# Altium PCB Display.PcbDoc
Units mm, origin at the board's own origin, x right, y up, seen from the top; angles counter-clockwise.
Board outline 43 x 35 mm, 2 copper layers (Top Layer, Bottom Layer); 41 components, 45 nets, 149 pads, 84 vias.
Unrouted connection lines stored in the file: 1.
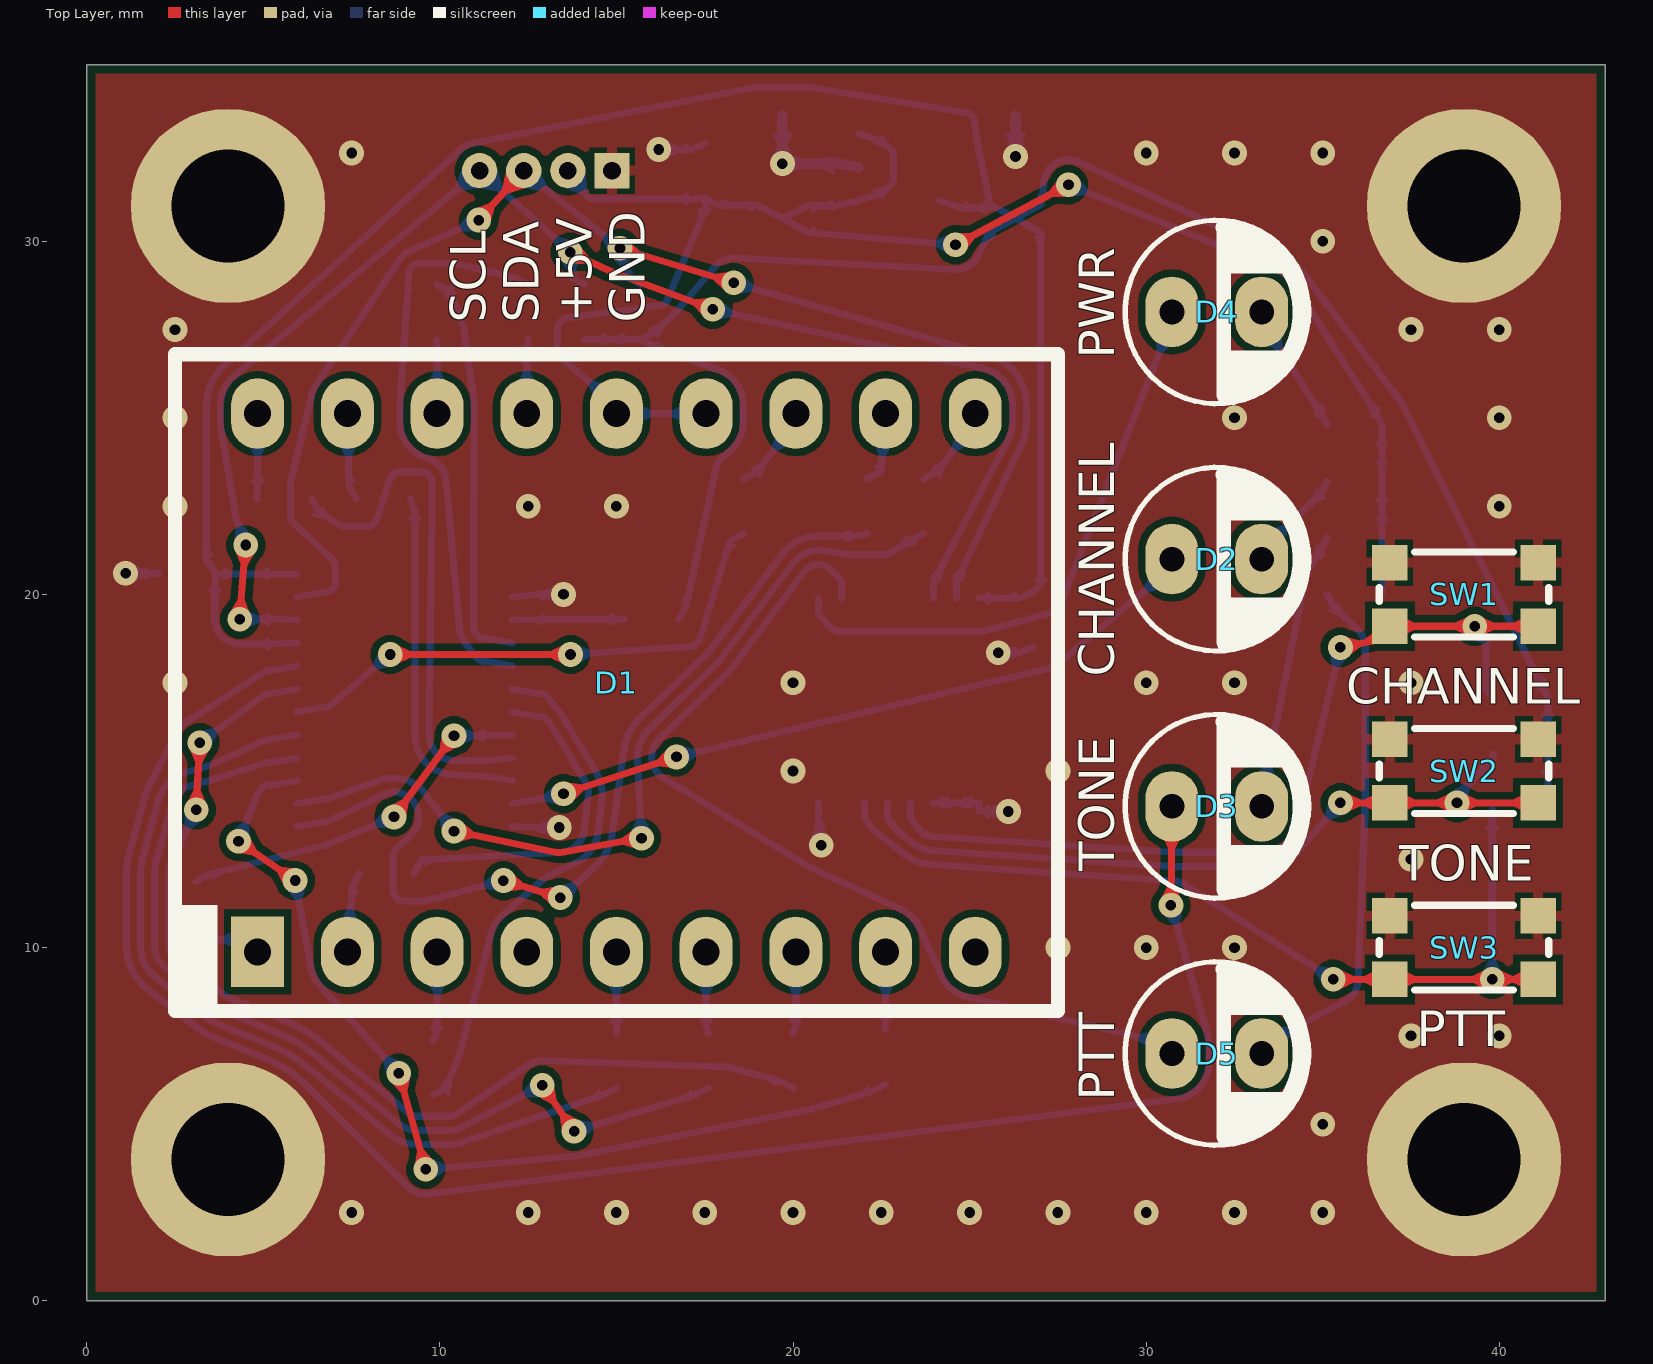
[diagram p0: Top Layer view]
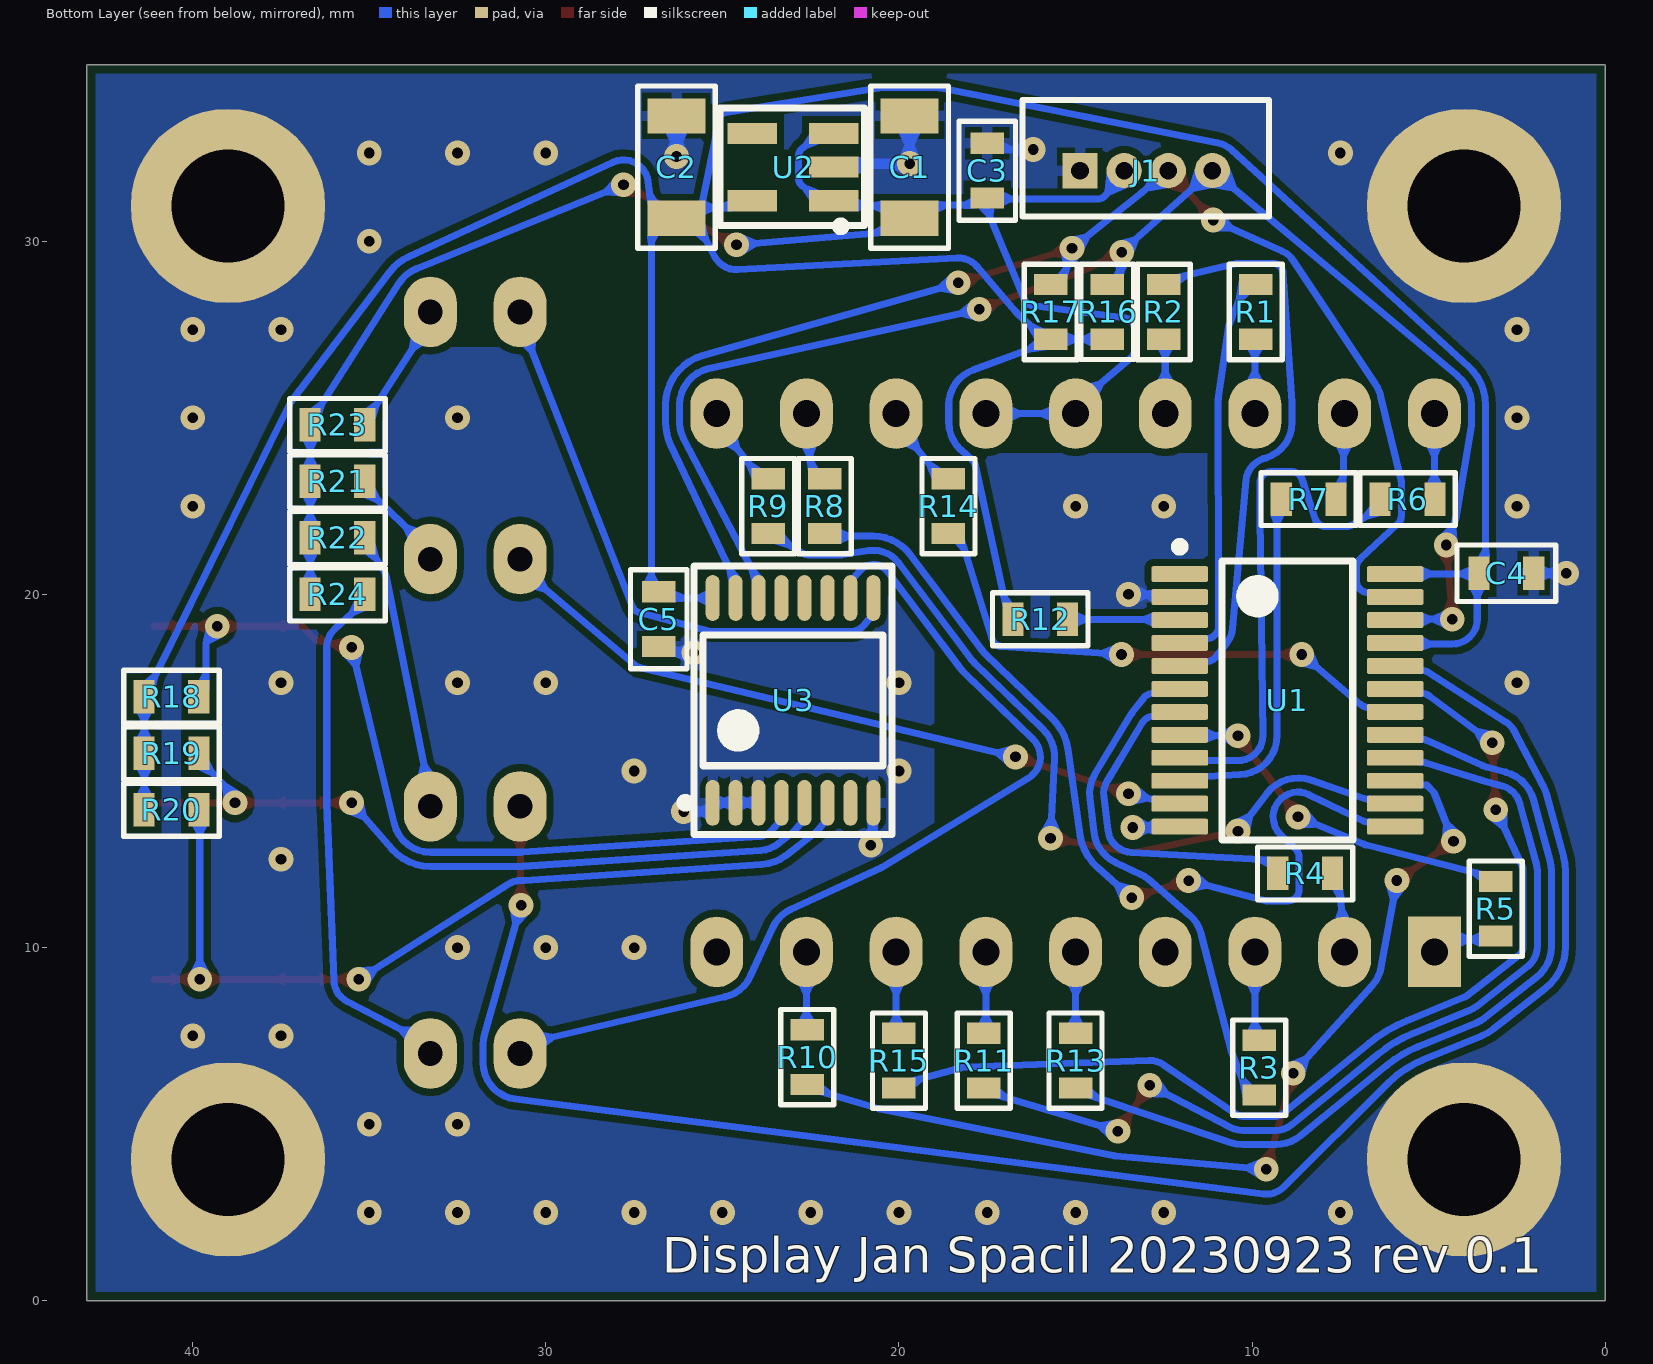
[diagram p1: Bottom Layer view, seen from below]
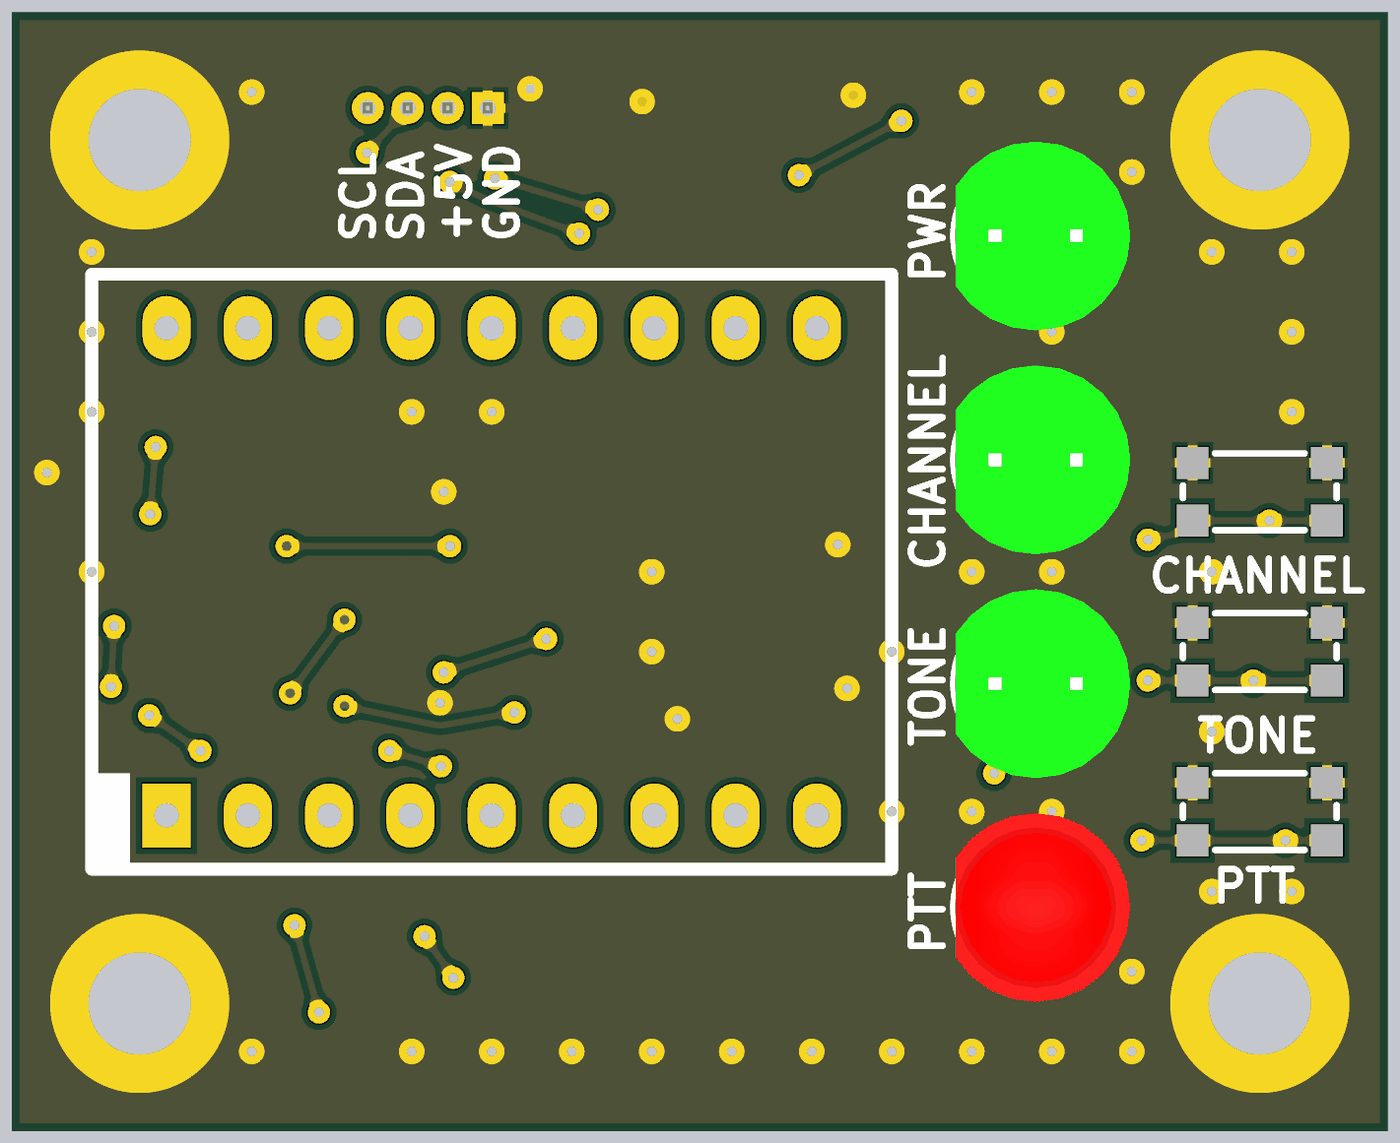
[diagram p2: 3D render of the assembled board from above, using the file's embedded part models]
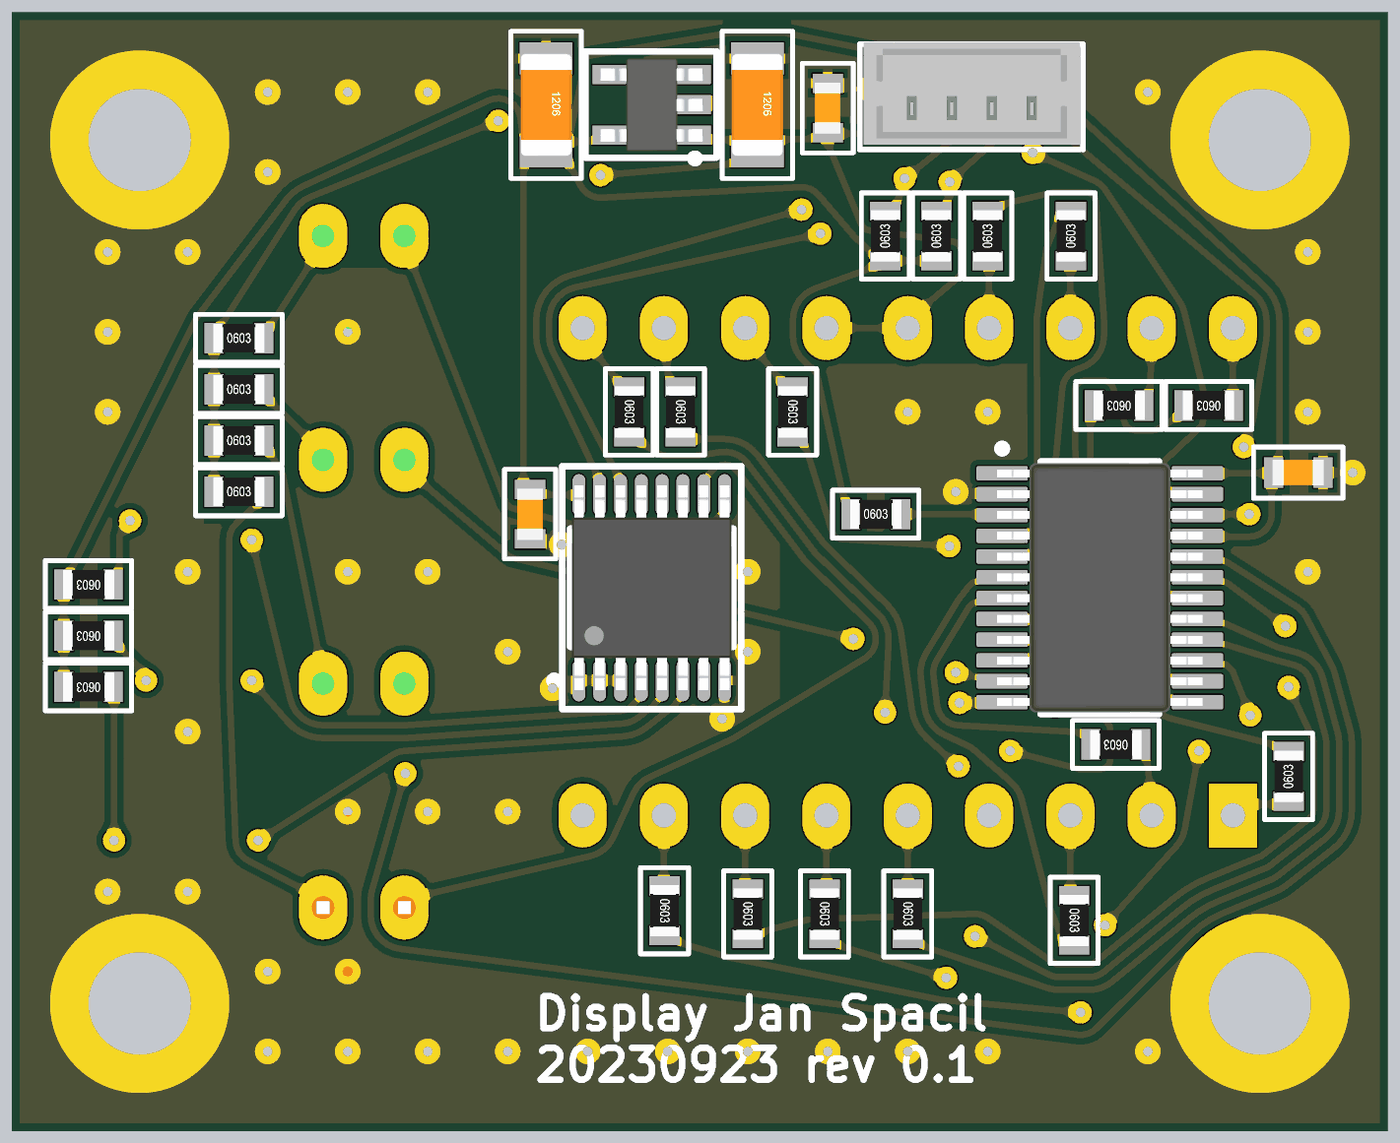
[diagram p3: 3D render of the assembled board from below, using the file's embedded part models]

## Layer stack, top to bottom
Top Solder: solder mask 0.0102, Solder Resist, Dk 3.5
Top Layer: signal copper 0.0356
Dielectric 1: dielectric 0.32, FR-4, Dk 4.8
Bottom Layer: signal copper 0.0356
Bottom Solder: solder mask 0.0102, Solder Resist, Dk 3.5

## Board outline
0,0 0,35 43,35 43,0

## Design rules (kind name [scope] priority, off if disabled: settings)
Clearance [All] p1: gap=0.2 ignorepadtopadclearanceinfootprint=FALSE except(0: Arc-Hole Track-Hole SMDPad-Hole THPad-Hole Via-Hole Fill-Hole Poly-Hole Region-Hole Text-Hole; 0.254: Arc-Via Track-Via Via-Via; 0.5: THPad-Via)
ComponentClearance [All] p1: gap=0.15 collisioncheckmode=3 verticalgap=0.254 showdistances=FALSE
HoleSize [All] p1: absolutevalues=TRUE maxlimit=6.3 minlimit=0.2 maxpercent=80.000 minpercent=20.000
HoleToHoleClearance [All] p1: gap=0.5 allowstackedmicrovias=TRUE
MinimumAnnularRing [All] p1: minimumring=0.13
MinimumSolderMaskSliver [All] p1: minsoldermaskwidth=0.2
PlaneConnect [All] p1: planeconnectstyle=Direct reliefexpansion=0.508 reliefentries=4 reliefconductorwidth=0.254 reliefairgap=0.254
PolygonConnect "Free pads to gnd" [(ObjectKind = 'Pad') And (Component = 'Free') vs InNet('GND')] p1: connectstyle=Direct reliefconductorwidth=0.254 reliefentries=4 polygonreliefangle="90 Angle" airgapwidth=0.254
PolygonConnect "Footprint connection" [All vs HasFootprint('DCC6C') or HasFootprint('32K243-40ML5 ro4003c') or HasFootprint('CONUFL001-SMD-T')] p2: connectstyle=Direct reliefconductorwidth=0.254 reliefentries=4 polygonreliefangle="90 Angle" airgapwidth=0.254
PolygonConnect "Via connection" [All vs IsVia or IsShieldingVia or IsStitchingVia] p3: connectstyle=Direct reliefconductorwidth=0.254 reliefentries=4 polygonreliefangle="90 Angle" airgapwidth=0.254
PolygonConnect [All] p4: connectstyle=Relief reliefconductorwidth=0.3 reliefentries=4 polygonreliefangle="90 Angle" airgapwidth=0.15
RoutingCorners [All] p1: cornerstyle=45-Degree minsetback=1 maxsetback=2.54
RoutingVias [All] p1: holewidth=0.3 width=0.6 viastyle="Through Hole" minholewidth=0.3 minwidth=0.6 maxholewidth=6 maxwidth=7
SilkToSilkClearance [All] p1: silktosilkclearance=0
SilkToSolderMaskClearance [IsPad] p1: minsilkscreentomaskgap=0.15 clearancetoexposedcopper=TRUE
SolderMaskExpansion SolderMaskExpansion_1 [IsVia] p1: expansion=-0.1 istentingtop=FALSE
SolderMaskExpansion [All] p2: expansion=0.05 istentingtop=FALSE
UnRoutedNet [All] p1: checkbadconnections=TRUE
Width [All] p1: maxlimit=3 minlimit=0.15 preferedwidth=0.2
21 further rules are at their usual default settings.

## Components (designator, comment, footprint, x,y, rotation, side; value= is the part's Value field where it differs from the comment)
C1 "10u, 50V, X5R" SMD1206 19.7,32.1 r270 bottom
C2 "10u, 50V, X5R" SMD1206 26.3,32.1 r270 bottom
C3 "1u, 25V, X7R" SMD0603 17.5,32 r90 bottom
C4 "1u, 25V, X7R" SMD0603 2.8,20.6 r180 bottom
C5 "1u, 25V, X7R" SMD0603 26.8,19.3 r270 bottom
D1 "HDSP-521E" HDSP-521E 15,17.5 r0 top locked
D2 "Green" "Cree C566D green" 32,21 r180 top locked
D3 "Green" "Cree C566D green" 32,14 r180 top locked
D4 "Green" "Cree C566D green" 32,28 r180 top locked
D5 "Red" "Cree C566D RED" 32,7 r180 top locked
J1 "53047-0410" 530470410 13,32 r180 bottom
R1 "1k, 1%" "SMD0603 - R" 9.9,28 r90 bottom
R2 "1k, 1%" "SMD0603 - R" 12.5,28 r90 bottom
R3 "1k, 1%" "SMD0603 - R" 9.8,6.6 r270 bottom
R4 "1k, 1%" "SMD0603 - R" 8.5,12.1 r0 bottom
R5 "1k, 1%" "SMD0603 - R" 3.1,11.1 r90 bottom
R6 "1k, 1%" "SMD0603 - R" 5.6,22.7 r0 bottom
R7 "1k, 1%" "SMD0603 - R" 8.4,22.7 r0 bottom
R8 "1k, 1%" "SMD0603 - R" 22.1,22.5 r270 bottom
R9 "1k, 1%" "SMD0603 - R" 23.7,22.5 r270 bottom
R10 "1k, 1%" "SMD0603 - R" 22.6,6.9 r270 bottom
R11 "1k, 1%" "SMD0603 - R" 17.6,6.8 r270 bottom
R12 "100k, 1%" "SMD0603 - R" 16,19.3 r180 bottom
R13 "1k, 1%" "SMD0603 - R" 15,6.8 r270 bottom
R14 "1k, 1%" "SMD0603 - R" 18.6,22.5 r270 bottom
R15 "1k, 1%" "SMD0603 - R" 20,6.8 r270 bottom
R16 "100k, 1%" "SMD0603 - R" 14.1,28 r90 bottom
R17 "100k, 1%" "SMD0603 - R" 15.7,28 r90 bottom
R18 "100k, 1%" "SMD0603 - R" 40.6,17.1 r0 bottom
R19 "100k, 1%" "SMD0603 - R" 40.6,15.5 r0 bottom
R20 "100k, 1%" "SMD0603 - R" 40.6,13.9 r0 bottom
R21 "10k, 1%" "SMD0603 - R" 35.9,23.2 r180 bottom
R22 "10k, 1%" "SMD0603 - R" 35.9,21.6 r180 bottom
R23 "10k, 1%" "SMD0603 - R" 35.9,24.8 r180 bottom
R24 "10k, 1%" "SMD0603 - R" 35.9,20 r180 bottom
SW1 "KMR241G" KMR2 39,20 r0 top
SW2 "KMR241G" KMR2 39,15 r0 top
SW3 "KMR241G" KMR2 39,10 r0 top
U1 "TCA9539PWR" PW0024A_M 9,17 r180 bottom
U2 "LDK320M33R" SOT23-5 23,32.1 r0 bottom
U3 "TCA9534APWR" TSSOP16N 23,17 r90 bottom

## Footprints (in the part's own frame and the unit in brackets; to place one, negate y for a bottom-side part, rotate by r counter-clockwise, add the part's x,y. Pads: shape width x height; smd on the part's side, far side on the other; paste and mask are expansions set on the pad)
530470410 [mm]
  rect 1x1 hole 0.5: 1(-1.875,0)
  round 1 hole 0.5: 2(-0.625,0) 3(0.625,0) 4(1.875,0)
  silkscreen extent -3.5,-1.3 3.47,2, body extent -3.37,-1.15 3.38,2.05, height 4.23
"Cree C566D green" [mm]
  oval 1.5x2 hole 0.7 mask+0.05: 1(-1.27,0) 2(1.27,0)
  silkscreen extent -2.6,-2.6 2.6,2.6, body extent -2.95,-2.95 2.5,2.95, height 9.04
"Cree C566D RED" [mm]
  oval 1.5x2 hole 0.7 mask+0.05: 1(-1.27,0) 2(1.27,0)
  silkscreen extent -2.6,-2.6 2.6,2.6, body extent -2.95,-2.95 2.5,2.95, height 9.04
HDSP-521E [mm]
  rect 1.5x2 hole 0.762 mask+0.05: 1(-10.16,-7.62)
  oval 1.5x2 hole 0.762 mask+0.05: 2(-7.62,-7.62) 3(-5.08,-7.62) 4(-2.54,-7.62) 5(0,-7.62) 6(2.54,-7.62) 7(5.08,-7.62) 8(7.62,-7.62) 9(10.16,-7.62) 10(10.16,7.62) 11(7.62,7.62) 12(5.08,7.62) 13(2.54,7.62) 14(0,7.62) 15(-2.54,7.62) 16(-5.08,7.62) 17(-7.62,7.62) 18(-10.16,7.62)
  silkscreen extent -12.5,-9.3 12.5,9.3
KMR2 [mm]
  rect 1x1 smd: 1(-2.1,-0.9) 1(2.1,-0.9) 2(-2.1,0.9) 2(2.1,0.9)
  silkscreen extent -2.4,-1.2 2.4,1.2
PW0024A_M [mm] "SOP, 24-Leads, Body 7.9x4.5mm, Pitch 0.65mm, IPC Low Density"
  rrect22% 1.6x0.45 smd: 1(-3.05,3.575) 2(-3.05,2.925) 3(-3.05,2.275) 4(-3.05,1.625) 5(-3.05,0.975) 6(-3.05,0.325) 7(-3.05,-0.325) 8(-3.05,-0.975) 9(-3.05,-1.625) 10(-3.05,-2.275) 11(-3.05,-2.925) 12(-3.05,-3.575) 13(3.05,-3.575) 14(3.05,-2.925) 15(3.05,-2.275) 16(3.05,-1.625) 17(3.05,-0.975) 18(3.05,-0.325) 19(3.05,0.325) 20(3.05,0.975) 21(3.05,1.625) 22(3.05,2.275) 23(3.05,2.925) 24(3.05,3.575)
  silkscreen extent -3.17,-3.95 1.85,4.47, body extent -3.21,-3.9 3.21,3.9, height 1
SMD0603 [mm] "2-Leads, Body 1,60x0,85mm(0603), IPC Medium Density"
  rect 0.6x0.95 smd: 1(-0.775,0) 2(0.775,0)
  silkscreen extent -1.4,-0.8 1.4,0.8, body extent -0.8,-0.4 0.8,0.4, height 0.7
"SMD0603 - R" [mm] "2-Leads, Body 1,60x0,85mm(0603), IPC Medium Density"
  rect 0.6x0.95 smd: 1(-0.775,0) 2(0.775,0)
  silkscreen extent -1.35,-0.75 1.35,0.75, body extent -0.8,-0.45 0.8,0.45, height 0.5
SMD1206 [mm] "Chip Resistor, 2-Leads, Body 3,20x1,60mm(1206), IPC Medium Density"
  rect 1x1.65 smd: 1(-1.45,0) 2(1.45,0)
  silkscreen extent -2.3,-1.1 2.3,1.1, body extent -1.6,-0.8 1.6,0.8, height 1
SOT23-5 [mm] "SOT23, 5-Leads, Body 2,90x2,80mm, Pitch 0,95mm, IPC Medium Density"
  rect 1.4x0.6 smd: 1(-1.15,0.95) 2(-1.15,0) 3(-1.15,-0.95) 4(1.15,-0.95) 5(1.15,0.95)
  silkscreen extent -2.02,-1.68 2.08,1.8, body extent -1.6,-1.45 1.6,1.45, height 0.94
TSSOP16N [mm] "TSOP, 16-Leads, Body 5,00x4,40mm, Pitch 0,65mm, IPC Medium Density"
  oval 1.3x0.4 smd: 1(-2.9,2.275) 2(-2.9,1.625) 3(-2.9,0.975) 4(-2.9,0.325) 5(-2.9,-0.325) 6(-2.9,-0.975) 7(-2.9,-1.625) 8(-2.9,-2.275) 9(2.9,-2.275) 10(2.9,-1.625) 11(2.9,-0.975) 12(2.9,-0.325) 13(2.9,0.325) 14(2.9,0.975) 15(2.9,1.625) 16(2.9,2.275)
  silkscreen extent -3.8,-2.8 3.8,3.17, body extent -3.2,-2.5 3.2,2.5, height 1.1

## Part data
C1 C2: library part UMK316BBJ106KL-T, "CAP CER 10UF 50V X5R 1206", Capacitance=10u, Case/Package=1206, Manufacturer="Taiyo Yuden", Max Operating Temperature=85°C, Min Operating Temperature=-55°C, Supplier Part Number 1=963-UMK316BBJ106KL-T, Tolerance=10%, Voltage Rating=50V, Category="Ceramic Capacitors", ComponentLink1Description=http://ds.yuden.co.jp/TYCOMPAS/ut/detail.do?productNo=UMK316BBJ106KL-T&fileName=UMK316BBJ106KL-T_SS&mode=specSheetDownload&src-supplier=Digi-Key, ComponentLink1URL=http://ds.yuden.co.jp/TYCOMPAS/ut/detail.do?productNo=UMK316BBJ106KL-T&fileName=UMK316BBJ106KL-T_SS&mode=specSheetDownload&src-supplier=Digi-Key, ComponentLink2Description=https://www.yuden.co.jp/productdata/catalog/mlcc01_e.pdf?src-supplier=Digi-Key, ComponentLink2URL=https://www.yuden.co.jp/productdata/catalog/mlcc01_e.pdf?src-supplier=Digi-Key, ComponentLink3Description=http://www.yuden.co.jp/productdata/catalog/en/mlcc_all_e.pdf?src-supplier=Digi-Key, ComponentLink3URL=http://www.yuden.co.jp/productdata/catalog/en/mlcc_all_e.pdf?src-supplier=Digi-Key, Lead Free="Lead Free", Length=0.126inch, Manufacturer Part Number=UMK316BBJ106KL-T, Mount="Surface Mount", Packaging="Tape and Reel", Pricing 1="1=0,42000, 10=0,18000, 100=0,12800, 500=0,11000, 1000=0,09700, 2000=0,08000 (USD)", RoHS=Yes, Stock 1=207945, Supplier 1=Mouser, Supplier 2=Digi-Key, Supplier 3=Avnet, Supplier Part Number 2=587-5960-1-ND, Supplier Part Number 3=UMK316BBJ106KL-T, Thickness=0.071inch, Width=0.063inch
C3 C4 C5: library part CGA3E1X7R1E105K080AC, "CAP CER 1UF 25V X7R 0603", Capacitance=1u, Manufacturer="TDK Corporation", Operating Temperature="-55°C ~ 125°C", Package / Case="0603 (1608 Metric)", Ratings=AEC-Q200, Supplier Part Number 1=810-CGA3E1X7R1E105K, Temperature Coefficient=X7R, Tolerance=±10%, Voltage - Rated=25V, Applications=Automotive, Category=Capacitors, ComponentLink1Description=https://product.tdk.com/info/en/catalog/datasheets/mlcc_automotive_general_en.pdf, ComponentLink1URL=https://product.tdk.com/info/en/catalog/datasheets/mlcc_automotive_general_en.pdf, Failure Rate=-, Features=-, Height - Seated (Max)=-, Lead Spacing=-, Lead Style=-, Manufacturer Part Number=CGA3E1X7R1E105K080AC, Mounting Type="Surface Mount, MLCC", Packaging="Cut Tape (CT)", Part Status=Active, Pricing 1="1=0.2, 10=0.135, 100=0.0686, 500=0.04696, 1000=0.04154 (USD)", RoHS="RoHS Compliant", Size / Dimension="0.063\" L x 0.032\" W (1.60mm x 0.80mm)", Stock 1=109509, Supplier 1=Mouser, Supplier 2=Farnell, Supplier 3=Digi-Key, Supplier Part Number 2=2346962, Supplier Part Number 3=445-6931-1-ND, Thickness (Max)="0.035\" (0.90mm)"
D1: "Displays Segmented Panel 2DIGIT 16LED Hi-Eff. Red CA 18-Pin DIP Tube", Case/Package=DIP, Color=Red, Forward Current=20mA, Forward Voltage=2.05V, Manufacturer="Broadcom Avago", Max Operating Temperature=85°C, Max Power Dissipation=62.5mW, Min Operating Temperature=-35°C, Package Quantity=200, Reverse Voltage=5V, Supplier Part Number 1=630-HDSP-521E, Test Current=10mA, Category="LED Displays", Character Height=18.6mm, Character Width=7.8mm, Depth=18.6mm, Display Type=Segment, Dominant Wavelength=628nm, Element Configuration="Common Anode", Height=0.732inch, Illumination Color=Red, Lead Free="Lead Free", Length=25mm, Luminous Intensity=4mcd, Manufacturer Part Number=HDSP-521E, Mount="Through Hole", Number of Characters=2, Number of Elements=16, Number of Pins=18, Number of Positions=2, Number of Segments=14, Operating Supply Voltage=2.05V, Packaging=Rail/Tube, Power Consumption=62.5mW, Power Dissipation=62.5mW, Pricing 1="1=2.84000, 10=1.90000, 50=1.90000, 100=1.47000, 1000=1.12000, 10000=1.09000 (USD)", Radiation Hardening=No, REACH SVHC="No SVHC", RoHS=Yes, RoHS Compliant=Yes, Series=-, Stock 1=3408, Supplier 1=Mouser, Supplier 2=Farnell, Supplier 3=Digi-Key, Supplier 4=RSComponents, Supplier Part Number 2=1003314, Supplier Part Number 3=516-1206-5-ND, Supplier Part Number 4=8305126, Viewing Area (height)=14.22mm, Viewing Area Length=7.8mm, Wavelength=628nm, Width=0.984inch
D2 D3 D4: library part C566D-GFE-CY14Q7S1, "5-mm Oval Color Series Green", Case/Package=Radial, Forward Current=20mA, Forward Voltage=3.4V, Manufacturer=Cree, Max Operating Temperature=85°C, Min Operating Temperature=-40°C, Package Quantity=500, Power Rating=140mW, Reverse Voltage (DC)=5V, Supplier Part Number 1=941-C566DGFECY14Q7S1, Category=LEDs, Color=Green, ComponentLink1Description=https://datasheet.ciiva.com/29562/1275c566drffrfegffgfebffbfeaffafe-29562442.pdf?src-supplier=Digi-Key, ComponentLink1URL=https://datasheet.ciiva.com/29562/1275c566drffrfegffgfebffbfeaffafe-29562442.pdf?src-supplier=Digi-Key, Dominant Wavelength=527nm, Height=7.8mm, Illumination Color=Green, Length=5.2mm, Lens Color=Green, Lens Style=Elliptical, Lens Transparency=Clear, Luminous Intensity=8200mcd, Manufacturer Part Number=C566D-GFE-CY14Q7S1, Mount="Through Hole", Number of LEDs=1, Packaging=Bulk, RoHS=Yes, Stock 1=1161, Supplier 1=Mouser, Supplier 2=Digi-Key, Supplier Part Number 2=C566D-GFE-CY14Q7S1-ND, Test Current=20mA, Viewing Angle=30°, Wavelength=527nm, Width=4.6mm
D5: library part C566D-RFE-CV0X0BB1, "5-mm Oval Color Series Red", Case/Package=Radial, Forward Current=20mA, Forward Voltage=2.1V, Manufacturer=Cree, Max Operating Temperature=85°C, Min Operating Temperature=-40°C, Package Quantity=500, Power Rating=130mW, Reverse Voltage (DC)=5V, Supplier Part Number 1=941-C566DRFECV0X0BB1, Category=LEDs, Color=Red, ComponentLink1Description=https://datasheet.ciiva.com/29561/1275c566drffrfegffgfebffbfeaffafe-29561964.pdf?src-supplier=Digi-Key, ComponentLink1URL=https://datasheet.ciiva.com/29561/1275c566drffrfegffgfebffbfeaffafe-29561964.pdf?src-supplier=Digi-Key, Dominant Wavelength=621nm, Height=7.8mm, Illumination Color=Red, Length=5.2mm, Lens Color=Red, Lens Style=Elliptical, Lens Transparency=Clear, Luminous Intensity=3000mcd, Manufacturer Part Number=C566D-RFE-CV0X0BB1, Mount="Through Hole", Number of LEDs=1, Packaging=Bulk, RoHS=Yes, Stock 1=2915, Supplier 1=Mouser, Supplier 2=Digi-Key, Supplier 3="Arrow Electronics", Supplier Part Number 2=C566D-RFE-CV0X0BB1-ND, Supplier Part Number 3=C566D-RFE-CV0X0BB1, Test Current=20mA, Viewing Angle=30°, Wavelength=621nm, Width=4.6mm
J1: "1.25mm Pitch, PicoBlade PCB Header, Single Row, Vertical, Through Hole, Tin Plating, Friction Lock, 4 Circuits, Tray, 2.30mm PC Tail Length", Color=Natural, Contact Resistance=20mR, Housing Color=White, Manufacturer=Molex, Manufacturer Part Number=0530470410, Max Operating Temperature=85°C, Max Voltage Rating (AC)=125V, Min Operating Temperature=-40°C, Supplier Part Number 1=538-53047-0410, Category="Headers and Wire Housings", ComponentLink1Description=https://datasheet.ciiva.com/3934/87920530470410-pcb-headers-3934064.pdf?src-supplier=Arrow, ComponentLink1URL=https://datasheet.ciiva.com/3934/87920530470410-pcb-headers-3934064.pdf?src-supplier=Arrow, Connector Type="Blade Pin", Contact Material=Bronze, Contact Mating Length=0.089inch, Contact Plating=Tin, Depth=3.2mm, Housing Material=Nylon, Length=6.75mm, Mount="Through Hole", Number of Contacts=4, Number of Positions=4, Number of Rows=1, Orientation=Straight, Packaging=Tray, Pitch=1.25mm, Pricing 4="1=0,27000, 10=0,23400, 100=0,18000, 500=0,15400, 1000=0,13000, 5000=0,11200, 10000=0,10400 (USD)", RoHS=Yes, Stock 4=7971, Supplier 1=Mouser, Supplier 2=Farnell, Supplier 3=Digi-Key, Supplier 4=Avnet, Supplier Part Number 2=9733060, Supplier Part Number 3=WM1733-ND, Supplier Part Number 4=0530470410, Termination=Solder
R1 R2 R3 R4 R5 R6 R7 R8 R9 R10 R11 R13 R14 R15: library part MCWR06X1001FTL, "MULTICOMP - MCWR06X1001FTL - RES, THICK FILM, 1K, 1%, 0.1W, 0603", Manufacturer=MULTICOMP, Power Rating=100, Resistance=1k, Resistance Tolerance="± 1%", Resistor Case Style="0603 [1608 Metric]", Resistor Element Material="Thick Film", Supplier Part Number 1=2447272, Temperature Coefficient="± 100", Voltage Rating=50, Automotive Qualification Standard=-, ComponentLink1Description=http://www.farnell.com/datasheets/1849611.pdf, ComponentLink1URL=http://www.farnell.com/datasheets/1849611.pdf, Manufacturer Part Number=MCWR06X1001FTL, Packaging="Cut Tape", Pricing 1="10=0.0037, 100=0.0022, 500=0.0016, 1000=0.0012, 2500=0.001 (GBP)", Product Range="MCWR Series", RoHS=Y-EX, Stock 1=134740, Supplier 1=Farnell, Supplier 2=Newark, Supplier Part Number 2=94X1378, SVHC="No SVHC (07-Jul-2017)<!--FANDB--><div class=\"features-and-benefits-container\"><div class=\"features-and-benefits-desc-container\"><span class=\"features-and-benefits-container-desc\">SMD Chip Resistor, Thick Film, 1 kohm, 50 V, 0603 [1608 Metric], 100 mW, ± 1"
R12 R16 R17 R18 R19 R20: library part RC0603FR-07100KL, "RES SMD 100K OHM 1% 1/10W 0603", Manufacturer=Yageo, Operating Temperature="-55°C ~ 155°C", Package / Case="0603 (1608 Metric)", Power (Watts)="0.1W, 1/10W", Resistance=100k, Supplier Device Package=0603, Supplier Part Number 1=603-RC0603FR-07100KL, Temperature Coefficient=±100ppm/°C, Tolerance=±1%, Category=Resistors, ComponentLink1Description=http://www.yageo.com/documents/recent/PYu-RC_Group_51_RoHS_L_8.pdf, ComponentLink1URL=http://www.yageo.com/documents/recent/PYu-RC_Group_51_RoHS_L_8.pdf, Composition="Thick Film", Failure Rate=-, Features="Moisture Resistant", Height - Seated (Max)="0.022\" (0.55mm)", Manufacturer Part Number=RC0603FR-07100KL, Packaging="Cut Tape (CT)", Part Status=Active, Pricing 1="1=0.1, 10=0.015, 100=0.006, 1000=0.00268, 2500=0.00233 (USD)", RoHS="RoHS Compliant", Size / Dimension="0.063\" L x 0.032\" W (1.60mm x 0.80mm)", Stock 1=14618646, Supplier 1=Mouser, Supplier 2=Farnell, Supplier 3=Digi-Key, Supplier Part Number 2=9238727, Supplier Part Number 3=311-100KHRCT-ND
R21 R22 R23 R24: library part RC0603FR-0710KL, "YAGEO (PHYCOMP) - RC0603FR-0710KL - RES, THICK FILM, 10K, 1%, 0.1W, 0603", Manufacturer="YAGEO (PHYCOMP)", Power Rating=100, Resistance=10k, Resistance Tolerance="± 1%", Resistor Case Style="0603 [1608 Metric]", Resistor Element Material="Thick Film", Supplier Part Number 1=603-RC0603FR-0710KL, Temperature Coefficient="± 100", Voltage Rating=50, Automotive Qualification Standard=-, ComponentLink1Description=http://past.yageo.com/pdf/PYu-R_Packing_6.pdf, ComponentLink1URL=http://past.yageo.com/pdf/PYu-R_Packing_6.pdf, ComponentLink2Description=http://www.farnell.com/datasheets/2167052.pdf, ComponentLink2URL=http://www.farnell.com/datasheets/2167052.pdf, Manufacturer Part Number=RC0603FR-0710KL, MSL="MSL 1 - Unlimited<!--FANDB--><div class=\"features-and-benefits-container\"><div class=\"features-and-benefits-desc-container\"><span class=\"features-and-benefits-container-desc\">SMD Chip Resistor, Thick Film, 10 kohm, 50 V, 0603 [1608 Metric], 100 mW, ± 1", Packaging="Tape & Reel", Pricing 1="5000=0.0025, 25000=0.0014, 50000=0.0013 (GBP)", Product Range="RC Series", RoHS=YES, Stock 1=9995, Supplier 1=Mouser, Supplier 2=Farnell, Supplier 3=Digi-Key, Supplier Part Number 2=2421850, Supplier Part Number 3=311-10.0KHRCT-ND, SVHC="No SVHC (20-Jun-2016)"
SW1 SW2 SW3: library part "KMR241G LFS", "C & K COMPONENTS - KMR241G LFS - SWITCH, SMD, 4N, 0.05A, 32VDC, SPST-NO", Actuator / Cap Colour=Black, Contact Current Max=50, Contact Resistance=100, Contact Voltage DC Nom=32, Manufacturer="C & K COMPONENTS", Operating Force=4, Operating Temperature Max=85, Operating Temperature Min=-40, Power Rating="1VA<!--FANDB--><div class=\"features-and-benefits-container\"><div class=\"features-and-benefits-description\"><span class=\"features-benefits-value\">The KMR241G LFS is a micro-miniature SMD Tactile Switch with momentary action and SPST-NO contact arrangement. It has silver-plated gull-wing terminals and grounding pin.</span></div><div class=\"features-and-benefits-list\"><ul class=\"features-and-benefits-list-list\"><li class=\"features-and-benefits-list-item\">Top actuated</li><li class=\"features-and-benefits-list-item\">Excellent tactile feel</li><li class=\"features-and-benefits-list-item\">Ultra low current capabilities</li><li class=\"features-and-benefits-list-item\">300000-cycle Operating life</li><li class=\"features-and-benefits-list-item\">IP40 Protection rating</li></ul></div><div class=\"features-and-benefits-applications\"><ul class=\"features-and-benefits-value\"><li class=\"features-and-benefits-list-item\">Automotive</li><li class=\"features-and-benefits-list-item\">Industrial</li><li class=\"features-and-benefits-list-item\">Medical</li><li class=\"features-and-benefits-list-item\">Portable Devices</li></ul></div></div>", Supplier Part Number 1=611-KMR241GLFS, Actuation Type=Top, ComponentLink1Description=http://www.farnell.com/datasheets/1702857.pdf, ComponentLink1URL=http://www.farnell.com/datasheets/1702857.pdf, Contact Configuration=SPST-NO, External Depth=2.8, External Length / Height=1.9, External Width=4.6, Illumination="Non Illuminated", Manufacturer Part Number="KMR241G LFS", Pricing 1="1=0.384, 50=0.37, 100=0.218, 7000=0.185, 20000=0.181, 30000=0.178, 50000=0.174 (GBP)", Product Range=-, RoHS=YES, Stock 1=40256, Supplier 1=Mouser, Supplier 2=Farnell, Supplier 3=Digi-Key, Supplier Part Number 2=1437637, Supplier Part Number 3=CKN10248DKR-ND, SVHC="No SVHC (17-Dec-2015)", Switch Terminals=Solder
U1: library part CMP-0314-00251-2, "Remote 16-Bit I2C and SMBus, Low-Power I/O Expander with Interrupt Output, Reset & Config. Register, 1.65 to 5.5 V, -40 to 85 degC, 24-pin TSSOP (PW), Green (RoHS & no Sb/Br)", 5V Tolerant I/O=Yes, Manufacturer="Texas Instruments", Max Frequency(kHz)=400, # of I/Os=16, Code_JEDEC=MO-153, ComponentLink1Description=Datasheet, ComponentLink1URL=http://www.ti.com/general/docs/lit/getliterature.tsp?genericPartNumber=TCA9539&fileType=pdf, ComponentLink2Description="Package Specification", ComponentLink2URL=http://www.ti.com/litv/pdf/mpds177g, Configuration Registers=Yes, DatasheetVersion=SCPS202A, Eco-Plan="Green (RoHS & no Sb/Br)", I2C Address="1110 1xx", Interrupt Output=Yes, Low Power=Yes, Mounting Technology="Surface Mount", PackageDescription="24-Pin Thin Small Outline Package 0.65 mm Pitch", PackageReference=PW0024A, PackageVersion="revG, Feb-2011", PartNumber=TCA9539PWR, Push-Pull I/O Type=Yes, Reset Input=Yes, SubFamily="I2C IO Expander", Vcc range(V)="1.65 to 5.5"
U2: "IC REG LINEAR 200MA SOT23-5", Current - Output=200mA, Manufacturer=STMicroelectronics, Operating Temperature="-40°C ~ 125°C (TJ)", Package / Case="SC-74A, SOT-753", Supplier Device Package=SOT-23-5, Supplier Part Number 1=511-LDK320M33R, Voltage - Input (Max)=18V, Voltage - Output (Min/Fixed)=3.3V, Voltage Dropout (Max)="0.35V @ 200mA", Category="Integrated Circuits (ICs)", ComponentLink1Description=http://www.st.com/content/ccc/resource/technical/document/datasheet/0e/0c/26/c9/a4/d4/4b/a1/DM00236470.pdf/files/DM00236470.pdf/jcr:content/translations/en.DM00236470.pdf, ComponentLink1URL=http://www.st.com/content/ccc/resource/technical/document/datasheet/0e/0c/26/c9/a4/d4/4b/a1/DM00236470.pdf/files/DM00236470.pdf/jcr:content/translations/en.DM00236470.pdf, Control Features=Enable, Manufacturer Part Number=LDK320M33R, Mounting Type="Surface Mount", Output Configuration=Positive, Output Type=Fixed, Packaging="Cut Tape (CT)", Part Status=Active, Pricing 1="1=0.85, 10=0.748, 100=0.5733, 500=0.4532, 1000=0.36256 (USD)", Protection Features="Over Current, Over Temperature", PSRR="88dB (120Hz)", RoHS="RoHS Compliant", Stock 1=5592, Supplier 1=Mouser, Supplier 2=Farnell, Supplier 3=Digi-Key, Supplier Part Number 2=3130011, Supplier Part Number 3=497-17034-1-ND
U3: "IC I/O EXPANDER I2C 8B 16TSSOP", Case/Package=TSSOP, Frequency=400kHz, Manufacturer="Texas Instruments", Max Operating Temperature=85°C, Min Operating Temperature=-40°C, Supplier Part Number 1=595-TCA9534APWR, ComponentLink1Description=http://www.ti.com/general/docs/lit/getliterature.tsp?genericPartNumber=TCA9534A&&fileType=pdf&src-supplier=Avnet, ComponentLink1URL=http://www.ti.com/general/docs/lit/getliterature.tsp?genericPartNumber=TCA9534A&&fileType=pdf&src-supplier=Avnet, ComponentLink2Description=http://www.ti.com/lit/ds/symlink/tca9534a.pdf?src-supplier=Digi-Key, ComponentLink2URL=http://www.ti.com/lit/ds/symlink/tca9534a.pdf?src-supplier=Digi-Key, ComponentLink3Description=http://www.ti.com/general/docs/lit/getliterature.tsp?genericPartNumber=TCA9534A&&fileType=pdf&src-supplier=Avnet+Asia, ComponentLink3URL=http://www.ti.com/general/docs/lit/getliterature.tsp?genericPartNumber=TCA9534A&&fileType=pdf&src-supplier=Avnet+Asia, ComponentLink4Description=http://www.ti.com/lit/pdf/sszc003?src-supplier=Digi-Key, ComponentLink4URL=http://www.ti.com/lit/pdf/sszc003?src-supplier=Digi-Key, Contact Plating=Gold, Interface=I2C, Lead Free="Lead Free", Manufacturer Part Number=TCA9534APWR, Mount="Surface Mount", Number of I/Os=8, Number of Outputs=8, Number of Pins=16, Packaging="Tape and Reel", Pricing 1="1 = 1.25000, 10 = 1.07000, 50 = 1.07000, 100 = 0.81500, 500 = 0.72100, 1000 = 0.56900, 2000 = 0.50500, 10000 = 0.48600, 24000 = 0.47000, 50000 = 0.45500 (USD)", RoHS=Yes, Stock 1=3614, Supplier 1=Mouser, Supplier 2=Digi-Key, Supplier 3=Arrow, Supplier Part Number 2=296-40573-1-ND, Supplier Part Number 3=TCA9534APWR

## Free pads (board coordinates)
  round 5.5 hole 3.2: 8(4,4) 9(39,4) 10(39,31) 11(4,31)

## Via types
v1: diameter 0.7, hole 0.3, Top Layer to Bottom Layer, 84 vias

## Nets (pads, with @x,y where several pads share a name; then routed paths per layer and width w, separated by ;. In a path a pad name is that pad's centre, name@x,y a point inside that pad or via, vN(x,y) a via of type N, cw(c..) or ccw(c..) an arc to the next point about the centre after c; other vN are vias at no path point)
+3V3: C2.2 C4.1 C5.1 R12.1 R16.1 R17.1 R18.2 R19.2 R20.2 U1.21 U1.24 U2.5 U3.16 | length 104.7
  Bottom Layer w0.2: U1.21 5.25,18.596 4.329,18.596 cw(c4.329,19.3) 3.625,19.3 3.625,20.225 3.647,20.466 C4.1@3.658,20.593 ; U1.24 5.25,20.582 3.775,20.582 C4.1@3.658,20.593 ; R16.1 14.475,27.225 15.325,27.225 R17.1 ; R12.1 16.975,19.675 17.832,23.639 cw(c18.125,23.575) 17.922,23.796 18.248,24.095 ccw(c17.54,24.87) 18.59,24.87 18.59,25.37 ccw(c17.54,25.37) 17.901,26.356 16.075,27.025 R17.1 ; U2.5 24.75,30.95 C2.2@25.575,30.95 ; U3.16 26.425,19.9 C5.1 27.01,20.275 27.01,24.869 ; 27.01,24.87 27.01,30.25 C2.2 ; R20.2 41.375,14.275 41.375,16.725 R18.2 41.175,17.475 37.244,25.408 ccw(c36.975,25.275) 37.214,25.457 34.424,29.127 ccw(c33.27,28.25) 33.878,29.566 28.095,32.239 ccw(c27.8,31.6) 27.101,31.684 27.025,31.05 C2.2 ; C4.1@3.658,20.593 3.39,20.975 3.39,25.37 cw(c4.84,25.37) 3.861,26.44 10.585,32.59 cw(c11.125,32) 10.969,32.785 18.817,34.344 cw(c18.875,34.05) 18.875,34.35 20.525,34.35 cw(c20.525,34.05) 20.573,34.346 24.898,33.646 cw(c24.85,33.35) 25.149,33.373 25.176,33.027 ccw(c25.475,33.05) 25.181,32.992 25.546,31.19 25.556,31.141 ccw(c25.752,31.181) 25.556,31.138 25.575,31.05 25.617,31.027 C2.2 ; R17.1 16.075,27.425 16.652,27.963 ccw(c16.175,28.475) 16.707,28.021 17.783,29.281 cw(c18.318,28.823) 18.356,29.526 24.564,29.197 ccw(c24.6,29.9) 25.225,29.576 25.575,30.25 C2.2
+5V: C1.2 C3.1 D1.13 D1.14 J1.2 R21.1 R22.1 R23.1 R24.1 U2.1 U2.3 | length 49.3
  Top Layer w0.2: v1(24.6,29.9) v1(27.8,31.6)
  Bottom Layer w0.2: J1.2 14.135,31.32 ccw(c14.375,31.5) 14.375,31.2 17.125,31.2 C3.1 ; D1.13 D1.14 15,25.37 13.43,26.697 cw(c13.625,26.925) 13.325,26.925 13.325,27.525 cw(c13.625,27.525) 13.585,27.822 16.215,28.178 ccw(c16.175,28.475) 16.452,28.361 17.523,30.937 ccw(c17.338,31.014) 17.538,30.996 17.54,31.025 C3.1 ; U2.3 22.45,32.85 22.73,32.64 cw(c22.55,32.4) 22.85,32.4 22.85,31.8 cw(c22.55,31.8) 22.73,31.56 22.45,31.35 U2.1 21.25,31.01 20.425,31.01 C1.2 ; v1(24.6,29.9) 20.425,30.25 C1.2 ; v1(27.8,31.6) 33.664,29.223 cw(c33.27,28.25) 34.155,28.814 36.475,25.175 R23.1 R24.1 ; C3.1 17.875,31.025 18.975,31.025 C1.2
A1: R1.2 U1.4 | length 11.3
  Bottom Layer w0.2: R1.2 10.275,28.575 10.653,27.637 cw(c10.375,27.525) 10.672,27.567 10.96,25.516 cw(c9.92,25.37) 10.97,25.37 10.97,24.87 cw(c9.92,24.87) 10.97,24.865 10.95,20.752 ccw(c11.299,20.75) 10.95,20.75 10.95,19.099 ccw(c11.299,19.099) 11.299,18.75 11.35,18.75 U1.4
A2: R8.2 U1.13 | length 26
  Top Layer w0.2: v1(11.8,11.897) v1(13.412,11.416)
  Bottom Layer w0.2: U1.13 6.65,13.55 6.7,13.55 ccw(c6.7,13.899) 6.853,13.585 8.392,14.333 cw(c8.7,13.7) 9.186,13.19 8.767,12.792 ccw(c8.975,12.575) 8.675,12.575 8.675,11.625 ccw(c8.975,11.625) 8.975,11.325 9.575,11.325 ccw(c9.575,11.625) 9.651,11.335 v1(11.8,11.897) ; v1(13.412,11.416) 14.381,12.274 ccw(c13.384,13.4) 14.874,13.192 15.211,15.61 cw(c16.7,15.4) 15.656,16.482 17.561,18.321 ccw(c17.075,18.825) 17.635,18.405 19.686,21.132 cw(c20.725,20.35) 20.725,21.65 21.725,21.65 R8.2
B1: R2.2 U1.5 | length 16.3
  Bottom Layer w0.2: U1.5 11.35,18.1 11.299,18.1 cw(c11.299,18.449) 11.024,18.234 10.709,18.638 cw(c11.299,19.099) 10.553,19.032 10.172,23.238 ccw(c9.475,23.175) 9.688,23.842 9.6,23.87 cw(c9.92,24.87) 8.87,24.87 8.87,25.37 cw(c9.92,25.37) 8.872,25.441 9.126,29.096 cw(c9.425,29.075) 9.425,29.375 10.375,29.375 cw(c10.375,29.075) 10.443,29.367 12.125,28.975 R2.2
B2: R9.2 U1.14 | length 24
  Top Layer w0.2: v1(10.4,13.3) 13.241,12.711 ccw(c13.384,13.4) 13.508,12.707 v1(15.708,13.1)
  Bottom Layer w0.2: U1.14 6.65,14.2 6.7,14.2 ccw(c6.7,14.549) 6.814,14.219 8.341,14.744 cw(c8.7,13.7) 9.575,14.373 v1(10.4,13.3) ; v1(15.708,13.1) 15.597,15.346 cw(c16.7,15.4) 15.934,16.195 17.839,18.034 ccw(c17.075,18.825) 17.954,18.164 20.006,20.891 cw(c20.725,20.35) 20.863,21.239 21.579,21.129 ccw(c21.625,21.425) 21.625,21.125 22.575,21.125 ccw(c22.575,21.425) 22.729,21.168 23.325,21.525 R9.2
C1: R3.2 U1.6 | length 14.6
  Bottom Layer w0.2: R3.2 10.175,6.025 10.553,6.963 ccw(c10.275,7.075) 10.565,7 11.443,10.392 cw(c12.46,10.13) 11.771,10.922 12.95,11.947 cw(c13.412,11.416) 13.113,12.053 13.853,12.4 ccw(c13.384,13.4) 14.48,13.267 14.596,14.22 ccw(c13.5,14.354) 14.445,14.924 13.442,16.588 ccw(c12.801,16.2) 13.391,16.662 13.076,17.066 ccw(c12.801,16.85) 12.801,17.2 12.75,17.2 U1.6
C2: R10.2 U1.15 | length 27.2
  Top Layer w0.2: v1(4.298,13.009) v1(5.9,11.9) ; v1(8.837,6.445) v1(9.6,3.721)
  Bottom Layer w0.2: v1(4.298,13.009) 4.85,14.395 5.055,14.6 5.25,14.6 U1.15 ; v1(5.9,11.9) 6.347,9.44 ccw(c7.38,9.63) 6.6,8.927 v1(8.837,6.445) ; v1(9.6,3.721) 13.863,4.103 ccw(c13.8,4.804) 13.937,4.113 20.535,5.431 ccw(c20.475,5.725) 20.559,5.437 22.225,5.925 R10.2
CHANNEL: R18.1 SW1.1 U3.4 | length 27
  Top Layer w0.2: v1(35.5,18.5) 36.5,18.7 36.9,19.1 v1(39.3,19.1) ; v1(39.3,19.1) 41.1,19.1 v1(39.3,19.1)
  Bottom Layer w0.2: U3.4 23.325,13.65 23.59,13.331 ccw(c23.975,13.65) 23.942,13.151 30.661,12.702 ccw(c30.73,13.75) 30.73,12.7 33.27,12.7 ccw(c33.27,13.75) 34.291,13.503 v1(35.5,18.5) ; v1(39.3,19.1) 39.3,18.965 39.625,18.64 39.625,17.3 R18.1
CHANNEL_LED: D2.2 U1.11 | length 20.4
  Top Layer w0.2: v1(13.5,14.354) v1(16.7,15.4)
  Bottom Layer w0.2: U1.11 12.75,14.2 12.801,14.2 ccw(c12.801,14.549) 12.88,14.209 v1(13.5,14.354) ; v1(16.7,15.4) 27.344,17.933 ccw(c27.275,18.225) 27.469,17.996 30.73,20.75 D2.2
D1: R4.2 U1.7 | length 9.9
  Bottom Layer w0.2: R4.2 9.475,12.475 13.424,12.697 ccw(c13.384,13.4) 14.083,13.315 14.199,14.269 ccw(c13.5,14.354) 14.103,14.718 13.1,16.381 ccw(c12.801,16.2) 12.801,16.55 12.75,16.55 U1.7
D2: R11.2 U1.16 | length 26.7
  Top Layer w0.2: v1(12.9,6.1) v1(13.8,4.804)
  Bottom Layer w0.2: U1.16 5.25,15.25 5.199,15.25 ccw(c5.199,14.9) 5.096,15.234 3.527,14.746 cw(c3.2,15.8) 3.49,14.735 2.917,14.58 ccw(c3.1,13.9) 2.42,14.082 1.95,12.359 ccw(c2.625,12.175) 1.925,12.175 1.925,10.025 ccw(c2.625,10.025) 2.194,9.473 3.659,8.328 ccw(c4.09,8.88) 3.824,8.233 5.459,7.563 cw(c4,4) 6.436,6.981 8.881,4.984 ccw(c9.325,5.525) 9.325,4.825 10.275,4.825 ccw(c10.275,5.525) 10.597,4.903 v1(12.9,6.1) ; v1(13.8,4.804) 17.225,5.825 R11.2
E1: R5.2 U1.8 | length 10.4
  Top Layer w0.2: v1(8.7,13.7) v1(10.4,16)
  Bottom Layer w0.2: R5.2 3.475,12.075 6.786,12.911 ccw(c6.7,13.249) 6.834,12.927 v1(8.7,13.7) ; v1(10.4,16) 11.35,16 U1.8
E2: R13.2 U1.17 | length 24.5
  Bottom Layer w0.2: U1.17 5.25,15.9 5.199,15.9 ccw(c5.199,15.55) 5.055,15.869 3.491,15.159 cw(c3.2,15.8) 3.383,15.12 2.814,14.966 ccw(c3.1,13.9) 2.035,14.189 1.563,12.463 ccw(c2.625,12.175) 1.525,12.175 1.525,10.025 ccw(c2.625,10.025) 1.948,9.158 3.415,8.012 ccw(c4.09,8.88) 3.671,7.863 5.308,7.193 cw(c4,4) 6.186,6.669 8.629,4.673 ccw(c9.325,5.525) 9.325,4.425 10.275,4.425 ccw(c10.275,5.525) 10.625,4.482 14.625,5.825 R13.2
F1: R6.2 U1.9 | length 14.8
  Bottom Layer w0.2: R6.2 6.575,22.325 7.171,21.968 ccw(c7.325,22.225) 7.325,21.925 7.925,21.925 ccw(c7.925,22.225) 8.21,22.13 8.59,23.27 cw(c8.875,23.175) 8.875,23.475 9.475,23.475 cw(c9.475,23.175) 9.775,23.175 9.775,22.225 cw(c9.475,22.225) 9.775,22.221 9.696,16.008 ccw(c10.4,16) 10.4,15.296 11.35,15.296 U1.9
F2: R14.2 U1.18 | length 15.4
  Top Layer w0.2: v1(8.592,18.3) v1(13.7,18.3)
  Bottom Layer w0.2: U1.18 6.65,16.8 6.7,16.8 ccw(c6.7,17.149) 6.927,16.883 v1(8.592,18.3) ; v1(13.7,18.3) 17.095,18.526 ccw(c17.075,18.825) 17.362,18.736 18.225,21.525 R14.2
G1: R7.2 U1.10 | length 10.1
  Bottom Layer w0.2: R7.2 9.296,22.325 9.296,16 ccw(c10.4,16) 10.345,14.897 11.282,14.85 ccw(c11.299,15.199) 11.299,14.85 11.35,14.85 U1.10
G2: R15.2 U1.19 | length 29
  Top Layer w0.2: v1(3.1,13.9) v1(3.2,15.8)
  Bottom Layer w0.2: v1(3.1,13.9) 2.353,12.302 ccw(c2.625,12.175) 2.325,12.175 2.325,10.025 ccw(c2.625,10.025) 2.44,9.789 3.905,8.644 ccw(c4.09,8.88) 3.976,8.602 5.611,7.933 cw(c4,4) 6.688,7.292 8.392,5.9 9.135,5.293 ccw(c9.325,5.525) 9.325,5.225 10.275,5.225 ccw(c10.275,5.525) 10.444,5.277 12.503,6.682 cw(c12.9,6.1) 12.924,6.804 18.085,6.625 cw(c18.075,6.325) 18.152,6.615 19.625,6.225 R15.2 ; v1(3.2,15.8) 4.991,17.131 cw(c5.199,16.85) 5.199,17.2 5.25,17.2 U1.19
GND: C1.1 C2.1 C3.2 C4.2 C5.2 J1.1 pad.8 pad.9 pad.10 pad.11 SW1.2 SW2.2 SW3.2 U1.2 U1.12 U2.2 U3.1 U3.2 U3.3 U3.8 | length 14.3
  Bottom Layer w0.2: v1(1.1,20.6) C4.2 ; U1.12 12.75,13.4 v1(13.384,13.4) ; U1.2 12.75,20 v1(13.5,20) ; v1(16.2,32.6) 17.125,32.6 C3.2 ; U3.8 20.725,13.65 v1(20.8,12.9) ; U3.3 U3.1 25.275,13.854 v1(26.1,13.854) ; v1(25.814,18.347) 26.425,18.347 C5.2
  Bottom Layer w0.3: C1.1 19.7,33.2 v1(19.7,32.2) 21.3,32.2 U2.2 ; v1(26.3,32.4) 26.3,33.2 C2.1
  other v1: 7.5,2.5 12.5,2.5 15,2.5 17.5,2.5 20,2.5 22.5,2.5 25,2.5 27.5,2.5 30,2.5 32.5,2.5 35,2.5 32.5,5 35,5 37.5,7.5 40,7.5 27.5,10 30,10 32.5,10 37.5,12.5 20,15 27.5,15 2.5,17.5 20,17.5 30,17.5 32.5,17.5 37.5,17.5 2.5,22.5 12.5,22.5 15,22.5 40,22.5 2.5,25 32.5,25 40,25 2.5,27.5 37.5,27.5 40,27.5 35,30 7.5,32.5 30,32.5 32.5,32.5 35,32.5
NetD1_1: D1.1 R5.1 | length 1.8
  Bottom Layer w0.2: R5.1 3.475,10.229 4.19,10.229 D1.1
NetD1_2: D1.2 R4.1 | length 2.3
  Bottom Layer w0.2: D1.2 7.38,10.13 7.525,11.725 R4.1
NetD1_3: D1.3 R3.1 | length 2.5
  Bottom Layer w0.2: R3.1 9.92,7.575 D1.3
NetD1_5: D1.5 R13.1 | length 2.3
  Bottom Layer w0.2: R13.1 D1.5
NetD1_6: D1.6 R11.1 | length 2.3
  Bottom Layer w0.2: D1.6 17.54,7.775 R11.1
NetD1_7: D1.7 R15.1 | length 2.3
  Bottom Layer w0.2: R15.1 20.08,7.775 D1.7
NetD1_8: D1.8 R10.1 | length 2.2
  Bottom Layer w0.2: R10.1 22.62,7.875 D1.8
NetD1_10: D1.10 R9.1 | length 2.4
  Bottom Layer w0.2: R9.1 24.075,23.475 25.16,24.87 D1.10
NetD1_11: D1.11 R8.1 | length 2.1
  Bottom Layer w0.2: R8.1 22.475,23.475 22.62,24.87 D1.11
NetD1_12: D1.12 R14.1 | length 2.5
  Bottom Layer w0.2: R14.1 18.975,23.475 20.08,24.87 D1.12
NetD1_15: D1.15 R2.1 | length 2.1
  Bottom Layer w0.2: D1.15 12.46,27.025 R2.1
NetD1_16: D1.16 R1.1 | length 2.1
  Bottom Layer w0.2: R1.1 9.92,27.025 D1.16
NetD1_17: D1.17 R7.1 | length 2.5
  Bottom Layer w0.2: D1.17 7.38,24.87 7.425,23.075 R7.1
NetD1_18: D1.18 R6.1 | length 2.4
  Bottom Layer w0.2: R6.1 4.84,23.075 D1.18
NetD2_1: D2.1 R21.2 | length 3
  Bottom Layer w0.2: D2.1 33.27,21.25 34.925,22.825 R21.2
NetD3_1: D3.1 R22.2 | length 7.9
  Bottom Layer w0.2: D3.1 33.27,14.25 34.531,20.534 cw(c34.825,20.475) 34.568,20.629 34.925,21.225 R22.2
NetD4_1: D4.1 R23.2 | length 3.7
  Bottom Layer w0.2: D4.1 33.27,27.75 34.925,25.175 R23.2
NetD5_1: D5.1 R24.2 | length 15
  Bottom Layer w0.2: D5.1 33.27,7.25 35.625,8.475 ccw(c35.3,9.1) 36.003,9.072 36.203,14.072 ccw(c35.5,14.1) 36.204,14.1 36.204,18.5 ccw(c35.5,18.5) 35.98,19.015 35.325,19.625 R24.2
NetR12_2: R12.2 U1.3 | length 3.2
  Bottom Layer w0.2: U1.3 12.75,19.296 15.025,19.296 R12.2
POWER_LED: D4.2 U3.9 | length 16.6
  Bottom Layer w0.2: U3.9 20.725,19.45 20.99,19.131 ccw(c21.375,19.45) 21.375,18.95 25.275,18.95 ccw(c25.275,19.45) 25.401,18.966 27.351,19.485 ccw(c27.275,19.775) 27.554,19.665 30.73,27.75 D4.2
PTT: R20.1 SW3.1 U3.6 | length 25.6
  Top Layer w0.2: v1(35.3,9.1) 36.9,9.1 SW3.1@41.1,9.1
  Bottom Layer w0.2: U3.6 22.025,13.65 22.29,13.331 ccw(c22.675,13.65) 22.366,13.257 23.177,12.624 ccw(c23.975,13.65) 23.887,12.353 30.606,11.904 ccw(c30.73,13.75) 30.705,11.9 cw(c30.7,11.196) 31.078,11.79 v1(35.3,9.1) ; v1(39.8,9.1) 39.8,13.875 R20.1
PTT_LED: D5.2 U3.10 | length 26.5
  Bottom Layer w0.2: U3.10 21.375,20.35 21.11,20.669 ccw(c20.725,20.35) 20.325,20.651 18.274,17.923 cw(c17.075,18.825) 18.117,17.746 16.212,15.907 ccw(c16.7,15.4) 16.332,14.8 20.433,12.299 ccw(c20.8,12.9) 20.504,12.261 23.059,11.084 cw(c22.62,10.13) 23.574,10.568 24.206,9.191 ccw(c25.16,9.63) 24.921,8.608 30.73,7.25 D5.2
SCL: J1.4 R16.2 U1.22 U3.14 | length 42
  Top Layer w0.2: v1(4.329,19.3) v1(4.5,21.4) ; v1(13.69,29.69) 14.798,29.164 ccw(c15.1,29.8) 14.856,29.139 v1(17.729,28.074)
  Bottom Layer w0.2: v1(4.329,19.3) 5.25,19.3 U1.22 ; v1(4.5,21.4) 4.242,22.125 cw(c4.525,22.225) 4.229,22.175 3.804,24.697 cw(c4.84,24.87) 3.79,24.87 3.79,25.37 cw(c4.84,25.37) 4.166,26.175 J1.4 13.636,29.757 cw(c13.503,29.608) 13.667,29.722 v1(13.69,29.69) 13.698,29.651 cw(c13.503,29.608) 13.703,29.615 13.725,28.975 R16.2 ; v1(17.729,28.074) 25.385,26.396 cw(c25.16,25.37) 26.21,25.37 26.21,24.87 cw(c25.16,24.87) 26.09,24.382 23.975,20.35 U3.14
SDA: J1.3 R17.2 U1.23 U3.15 | length 39.6
  Top Layer w0.2: v1(11.1,30.6) J1.3 ; v1(15.1,29.8) v1(18.318,28.823)
  Bottom Layer w0.2: U1.23 6.65,20.05 6.7,20.05 ccw(c6.7,20.399) 7.05,20.399 7.05,20.75 ccw(c6.7,20.75) 6.939,21.006 5.869,22.007 cw(c6.075,22.225) 5.775,22.225 5.775,23.175 cw(c6.075,23.175) 5.783,23.246 6.36,25.619 cw(c7.38,25.37) 6.506,25.952 8.842,29.462 cw(c9.425,29.075) 9.137,29.713 v1(11.1,30.6) ; J1.3 13.114,31.385 ccw(c13.625,32) 13.125,31.376 v1(15.1,29.8) 15.325,28.975 R17.2 ; v1(18.318,28.823) 25.557,26.765 cw(c25.16,25.37) 26.61,25.37 26.61,24.87 cw(c25.16,24.87) 26.471,24.25 24.625,20.35 U3.15
TONE: R19.1 SW2.1 U3.5 | length 21.8
  Top Layer w0.2: v1(35.5,14.1) 36.9,14.1 SW2.1@41.1,14.1
  Bottom Layer w0.2: U3.5 22.675,13.65 22.941,13.33 ccw(c23.325,13.65) 23.017,13.256 23.422,12.94 ccw(c23.975,13.65) 23.914,12.752 30.631,12.303 ccw(c30.73,13.75) 30.73,12.3 33.27,12.3 ccw(c33.27,13.75) 34.362,12.797 v1(35.5,14.1) ; v1(38.8,14.1) 38.896,14.196 38.896,14.396 39.825,15.325 R19.1
TONE_LED: D3.2 U1.20 | length 52
  Top Layer w0.2: v1(30.7,11.196) 30.73,13.75 D3.2
  Bottom Layer w0.2: U1.20 5.25,17.85 5.199,17.85 ccw(c5.199,17.5) 5.011,17.795 2.821,16.393 ccw(c3.2,15.8) 2.578,16.129 1.771,14.603 ccw(c3.1,13.9) 1.649,14.295 1.178,12.57 ccw(c2.625,12.175) 1.125,12.175 1.125,10.025 ccw(c2.625,10.025) 1.7,8.844 3.167,7.697 ccw(c4.09,8.88) 3.52,7.492 5.156,6.822 cw(c4,4) 6.152,6.161 9.104,3.221 ccw(c9.6,3.721) 9.689,3.023 30.862,5.708 ccw(c30.73,6.75) 31.78,6.75 31.78,7.25 ccw(c30.73,7.25) 31.74,7.537 v1(30.7,11.196)
pads on no net: D1.4 D1.9 U1.1 U2.4 U3.7 U3.11 U3.12 U3.13

## Polygon pours and split planes (outlines as drawn)
GND on Top Layer "GND_L01_P001" (solid, remove dead copper, pour order 1): 0.25,0.25 0.25,34.75 42.75,34.75 42.75,0.25
GND on Bottom Layer "GND_L02_P000" (solid, remove dead copper, pour order 0): 0.25,0.25 0.25,34.75 42.75,34.75 42.75,0.25

## Other copper
Bottom Layer:
  pour cut-out: 35,19 37,19 37,26 35,26
  pour cut-out: 31,27 34,27 34,28 31,28
  pour cut-out: 19,19 19,13 17,13 17,19
  pour cut-out: 11,24 18,24 18,25 11,25

## Silkscreen, mask and mechanical layers (free items; w line width, h text height)
Top Overlay:
  text "SCL" at 11.3,27.7 h1 r90
  text "SDA" at 12.8,27.7 h1 r90
  text "+5V" at 14.3,27.7 h1 r90
  text "GND" at 15.8,27.7 h1 r90
  text "PWR" at 29.1,26.667 h1 r90
  text "CHANNEL" at 29.1,17.668 h1 r90
  text "CHANNEL" at 35.668,16.9 h1
  text "TONE" at 29.1,12.167 h1 r90
  text "TONE" at 37.167,11.9 h1
  text "PTT" at 37.667,7.2 h1
  text "PTT" at 29.1,5.667 h1 r90
Bottom Overlay:
  text "Display Jan Spacil 20230923 rev 0.1" at 26.7,0.8 h1
Mechanical 1:
  the board outline again, w0.1